# Altium PCB FMC_DIO_32ch_lvds_a.PcbDoc (part 6 of 6)
Units mm, origin at the board's own origin, x right, y up, seen from the top; angles counter-clockwise.
Board outline 69.13 x 77.46 mm, 4 copper layers (Top Layer, G, SUP, Bottom Layer), stack 1.448 mm thick; 558 components, 348 nets, 1996 pads, 784 vias.
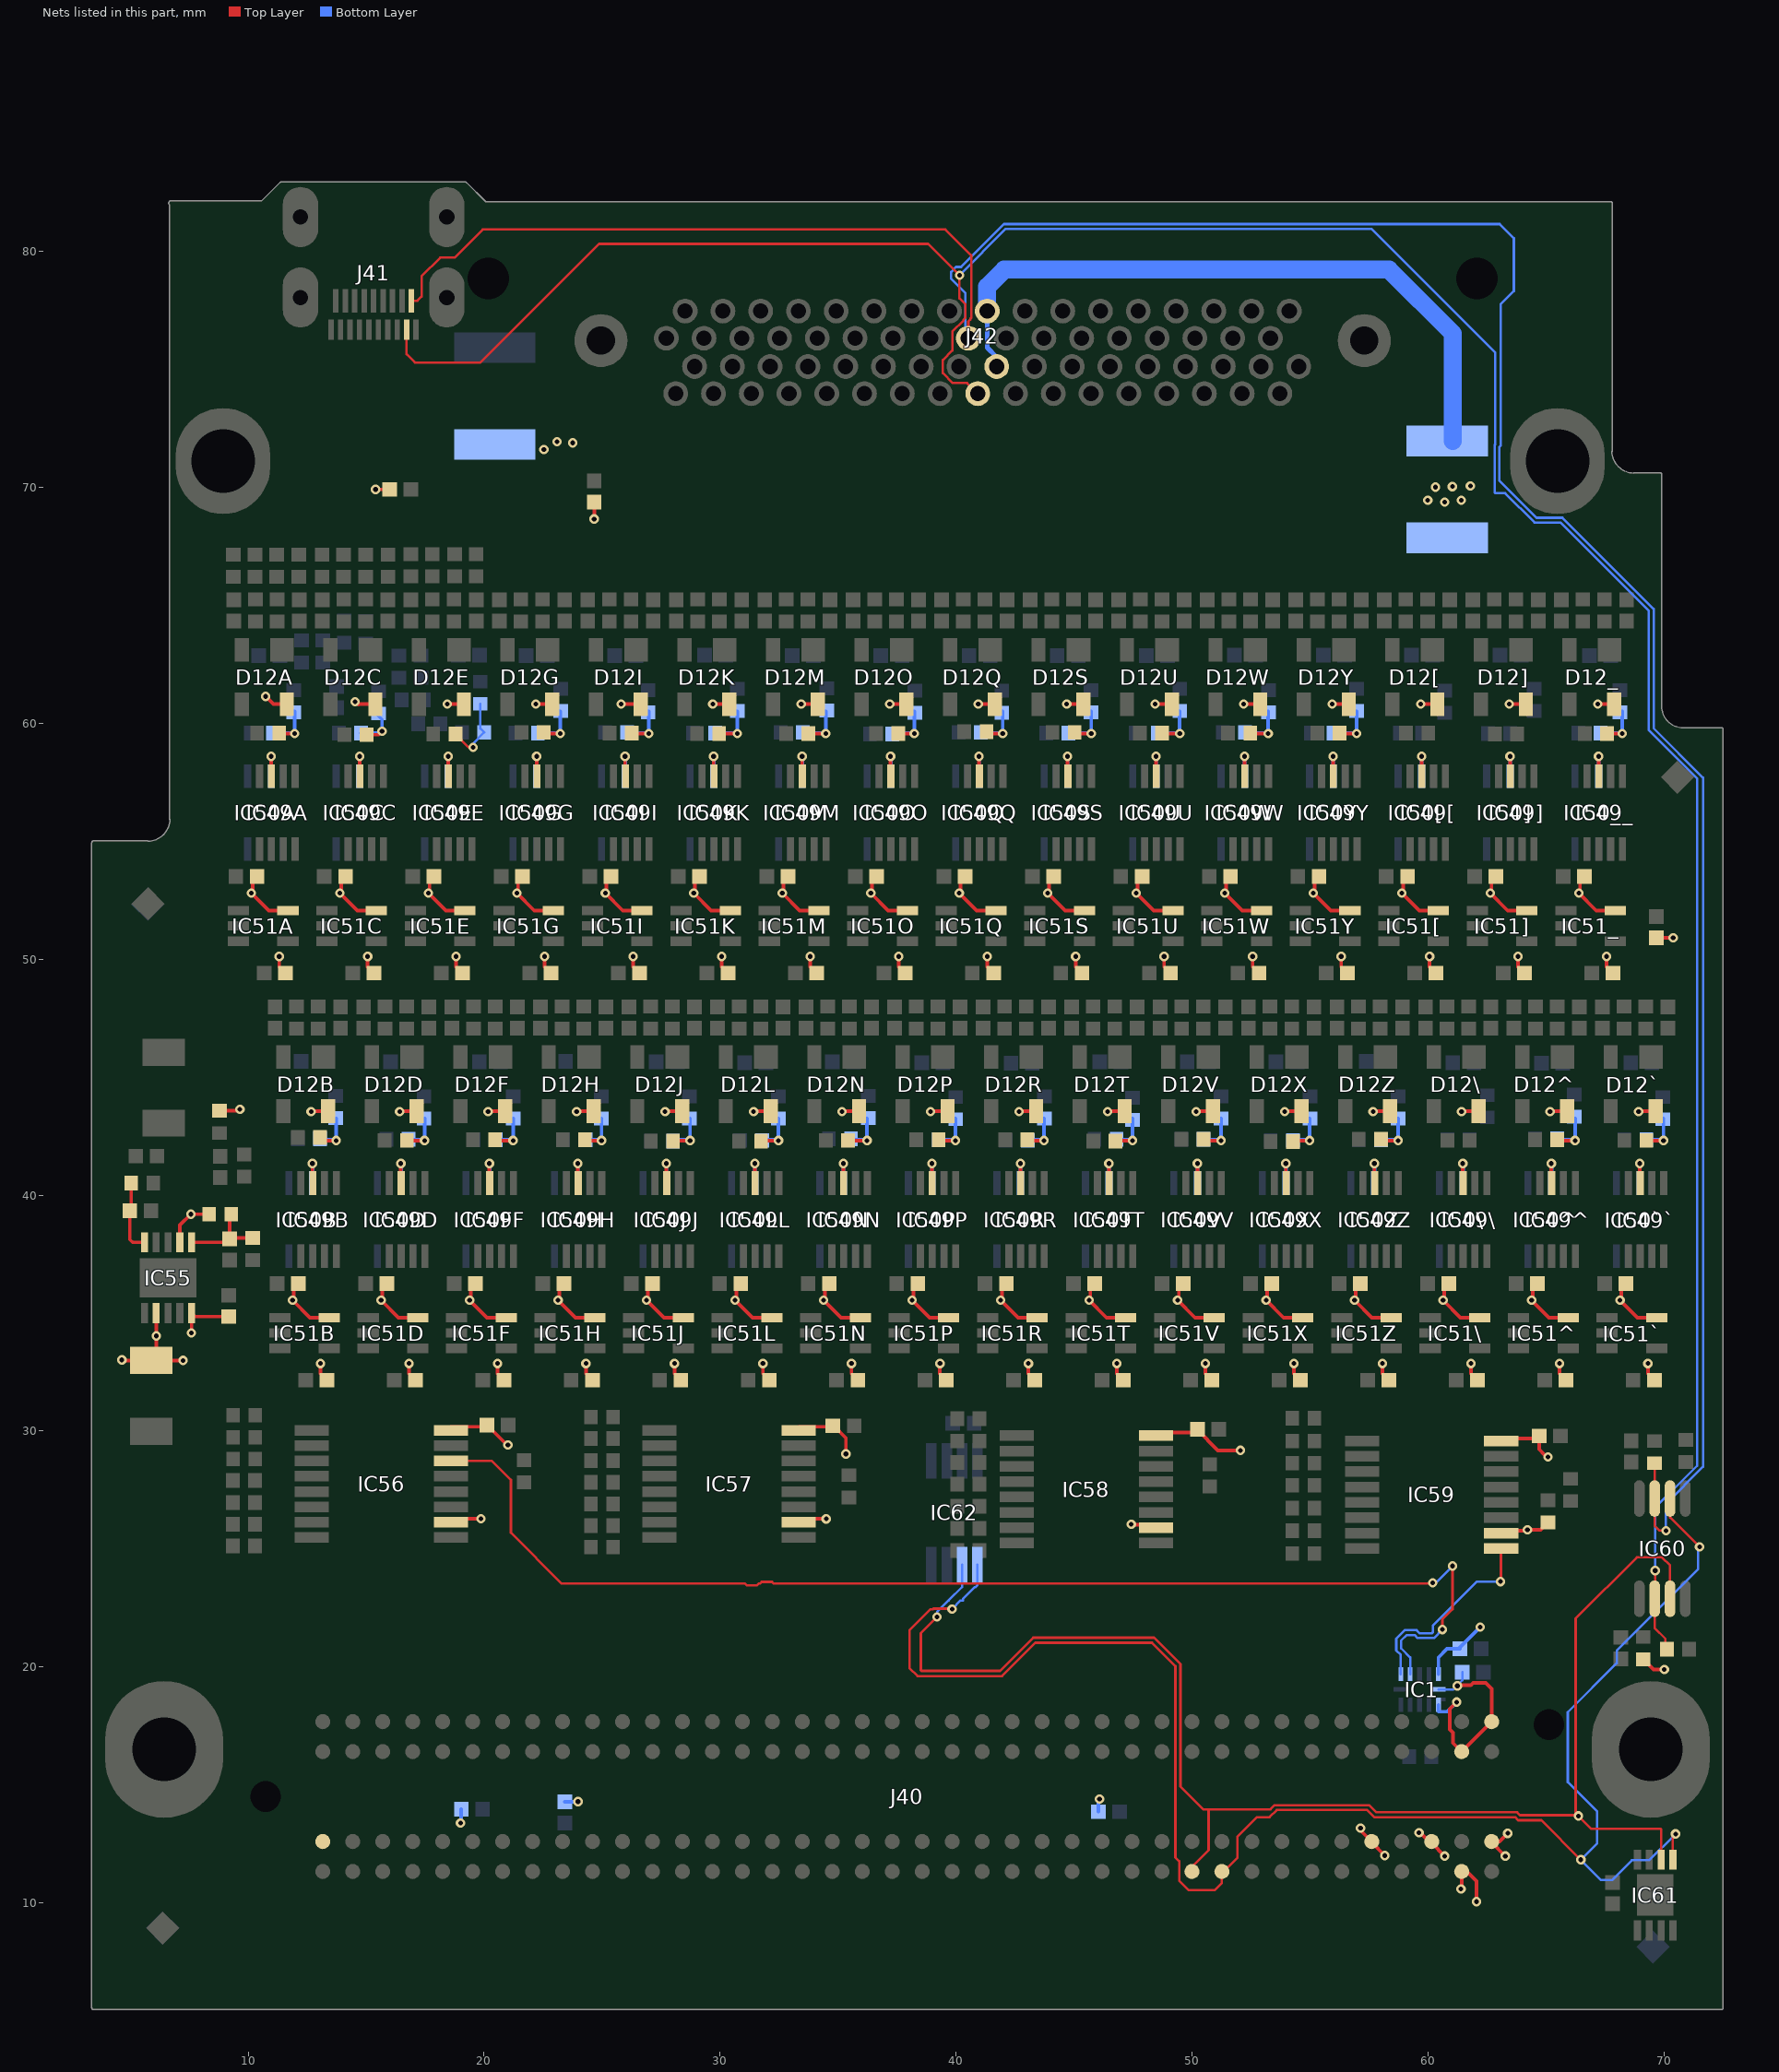
[diagram p8: the nets of this part, all layers, seen from the top]

## Via types
v1: diameter 0.4, hole 0.2, Top Layer to Bottom Layer, tented both sides, 760 vias
v2: diameter 0.4, hole 0.2, Top Layer to Bottom Layer, 24 vias

## Nets (pads, with @x,y where several pads share a name; then routed paths per layer and width w, separated by ;. In a path a pad name is that pad's centre, name@x,y a point inside that pad or via, vN(x,y) a via of type N, cw(c..) or ccw(c..) an arc to the next point about the centre after c; other vN are vias at no path point) (continued)
NetR1^_1: R1^.1 R244^.1 R245^.1 | length 2.3
  Top Layer w0.152: R245^.1@65.552,42.316 v1(66.225,42.316)
  Bottom Layer w0.152: R244^.1@65.501,42.342 v1@66.199,42.342 ; v1(66.225,42.316) R1^.1@66.225,43.243
NetR1__1: R1_.1 R244_.1 R245_.1 | length 2.3
  Top Layer w0.152: R245_.1@67.552,59.566 v1(68.225,59.566)
  Bottom Layer w0.152: R244_.1@67.501,59.592 v1@68.199,59.592 ; v1(68.225,59.566) R1_.1@68.225,60.493
NetR1`_1: R1`.1 R244`.1 R245`.1 | length 2.3
  Top Layer w0.152: R245`.1@69.302,42.316 v1(69.975,42.316)
  Bottom Layer w0.152: R244`.1@69.251,42.342 v1@69.949,42.342 ; v1(69.975,42.316) R1`.1@69.975,43.243
NetR1A_1: R1A.1 R244A.1 R245A.1 | length 2.3
  Top Layer w0.152: R245A.1@11.302,59.566 v1(11.975,59.566)
  Bottom Layer w0.152: R244A.1@11.251,59.592 v1@11.949,59.592 ; v1(11.975,59.566) R1A.1@11.975,60.493
NetR1B_1: R1B.1 R244B.1 R245B.1 | length 2.3
  Top Layer w0.152: R245B.1@13.052,42.316 v1(13.725,42.316)
  Bottom Layer w0.152: R244B.1@13.001,42.342 v1@13.699,42.342 ; v1(13.725,42.316) R1B.1@13.725,43.243
NetR1C_1: R1C.1 R244C.1 R245C.1 | length 2.5
  Top Layer w0.152: R245C.1@15.024,59.512 15.519,59.512 v1(15.672,59.665)
  Bottom Layer w0.152: R244C.1@14.783,59.588 15.596,59.588 v1(15.672,59.665) 15.672,60.16 R1C.1@15.418,60.414
NetR1D_1: R1D.1 R244D.1 R245D.1 | length 2.3
  Top Layer w0.152: R245D.1@16.802,42.316 v1(17.475,42.316)
  Bottom Layer w0.152: R244D.1@16.751,42.342 v1@17.449,42.342 ; v1(17.475,42.316) R1D.1@17.475,43.243
NetR1E_1: R1E.1 R244E.1 R245E.1 | length 3.1
  Top Layer w0.102: R245E.1@18.783,59.538 19.342,58.979 v1(19.533,58.979)
  Bottom Layer w0.102: v1(19.533,58.979) 19.507,59.004 19.507,59.118 R244E.1@20.003,59.614 19.837,59.779 R1E.1@19.837,60.82
NetR1F_1: R1F.1 R244F.1 R245F.1 | length 2.3
  Top Layer w0.152: R245F.1@20.552,42.316 v1(21.225,42.316)
  Bottom Layer w0.152: R244F.1@20.501,42.342 v1@21.199,42.342 ; v1(21.225,42.316) R1F.1@21.225,43.243
NetR1G_1: R1G.1 R244G.1 R245G.1 | length 2.3
  Top Layer w0.152: R245G.1@22.552,59.566 v1(23.225,59.566)
  Bottom Layer w0.152: R244G.1@22.501,59.592 v1@23.199,59.592 ; v1(23.225,59.566) R1G.1@23.225,60.493
NetR1H_1: R1H.1 R244H.1 R245H.1 | length 2.3
  Top Layer w0.152: R245H.1@24.302,42.316 v1(24.975,42.316)
  Bottom Layer w0.152: R244H.1@24.251,42.342 v1@24.949,42.342 ; v1(24.975,42.316) R1H.1@24.975,43.243
NetR1I_1: R1I.1 R244I.1 R245I.1 | length 2.3
  Top Layer w0.152: R245I.1@26.302,59.566 v1(26.975,59.566)
  Bottom Layer w0.152: R244I.1@26.06,59.563 R244I.1@26.06,59.614 ; R244I.1@26.251,59.592 v1@26.949,59.592 ; v1(26.975,59.566) R1I.1@26.975,60.493
NetR1J_1: R1J.1 R244J.1 R245J.1 | length 2.3
  Top Layer w0.152: R245J.1@28.052,42.316 v1(28.725,42.316)
  Bottom Layer w0.152: R244J.1@28.001,42.342 v1@28.699,42.342 ; v1(28.725,42.316) R1J.1@28.725,43.243
NetR1K_1: R1K.1 R244K.1 R245K.1 | length 2.3
  Top Layer w0.152: R245K.1@30.052,59.566 v1(30.725,59.566)
  Bottom Layer w0.152: R244K.1@30.001,59.592 v1@30.699,59.592 ; v1(30.725,59.566) R1K.1@30.725,60.493
NetR1L_1: R1L.1 R244L.1 R245L.1 | length 2.3
  Top Layer w0.152: R245L.1@31.802,42.316 v1(32.475,42.316)
  Bottom Layer w0.152: R244L.1@31.751,42.342 v1@32.449,42.342 ; v1(32.475,42.316) R1L.1@32.475,43.243
NetR1M_1: R1M.1 R244M.1 R245M.1 | length 2.3
  Top Layer w0.152: R245M.1@33.802,59.566 v1(34.475,59.566)
  Bottom Layer w0.152: R244M.1@33.751,59.592 v1@34.449,59.592 ; v1(34.475,59.566) R1M.1@34.475,60.493
NetR1N_1: R1N.1 R244N.1 R245N.1 | length 2.3
  Top Layer w0.152: R245N.1@35.552,42.316 v1(36.225,42.316)
  Bottom Layer w0.152: R244N.1@35.501,42.342 v1@36.199,42.342 ; v1(36.225,42.316) R1N.1@36.225,43.243
NetR1O_1: R1O.1 R244O.1 R245O.1 | length 2.3
  Top Layer w0.152: R245O.1@37.552,59.566 v1(38.225,59.566)
  Bottom Layer w0.152: R244O.1@37.501,59.592 v1@38.199,59.592 ; v1(38.225,59.566) R1O.1@38.225,60.493
NetR1P_1: R1P.1 R244P.1 R245P.1 | length 2.3
  Top Layer w0.152: R245P.1@39.302,42.316 v1(39.975,42.316)
  Bottom Layer w0.152: R244P.1@39.251,42.342 v1@39.949,42.342 ; v1(39.975,42.316) R1P.1@39.975,43.243
NetR1Q_1: R1Q.1 R244Q.1 R245Q.1 | length 2.3
  Top Layer w0.152: R245Q.1@41.302,59.566 v1(41.975,59.566)
  Bottom Layer w0.152: R244Q.1@41.251,59.592 v1@41.949,59.592 ; v1(41.975,59.566) R1Q.1@41.975,60.493
NetR1R_1: R1R.1 R244R.1 R245R.1 | length 2.3
  Top Layer w0.152: R245R.1@43.052,42.316 v1(43.725,42.316)
  Bottom Layer w0.152: R244R.1@43.001,42.342 v1@43.699,42.342 ; v1(43.725,42.316) R1R.1@43.725,43.243
NetR1S_1: R1S.1 R244S.1 R245S.1 | length 2.3
  Top Layer w0.152: R245S.1@45.052,59.566 v1(45.725,59.566)
  Bottom Layer w0.152: R244S.1@45.001,59.592 v1@45.699,59.592 ; v1(45.725,59.566) R1S.1@45.725,60.493
NetR1T_1: R1T.1 R244T.1 R245T.1 | length 2.3
  Top Layer w0.152: R245T.1@46.802,42.316 v1(47.475,42.316)
  Bottom Layer w0.152: R244T.1@46.751,42.342 v1@47.449,42.342 ; v1(47.475,42.316) R1T.1@47.475,43.243
NetR1U_1: R1U.1 R244U.1 R245U.1 | length 2.3
  Top Layer w0.152: R245U.1@48.802,59.566 v1(49.475,59.566)
  Bottom Layer w0.152: R244U.1@48.751,59.592 v1@49.449,59.592 ; v1(49.475,59.566) R1U.1@49.475,60.493
NetR1V_1: R1V.1 R244V.1 R245V.1 | length 2.3
  Top Layer w0.152: R245V.1@50.552,42.316 v1(51.225,42.316)
  Bottom Layer w0.152: R244V.1@50.501,42.342 v1@51.199,42.342 ; v1(51.225,42.316) R1V.1@51.225,43.243
NetR1W_1: R1W.1 R244W.1 R245W.1 | length 2.3
  Top Layer w0.152: R245W.1@52.552,59.566 v1(53.225,59.566)
  Bottom Layer w0.152: R244W.1@52.501,59.592 v1@53.199,59.592 ; v1(53.225,59.566) R1W.1@53.225,60.493
NetR1X_1: R1X.1 R244X.1 R245X.1 | length 2.3
  Top Layer w0.152: R245X.1@54.302,42.316 v1(54.975,42.316)
  Bottom Layer w0.152: R244X.1@54.251,42.342 v1@54.949,42.342 ; v1(54.975,42.316) R1X.1@54.975,43.243
NetR1Y_1: R1Y.1 R244Y.1 R245Y.1 | length 2.3
  Top Layer w0.152: R245Y.1@56.302,59.566 v1(56.975,59.566)
  Bottom Layer w0.152: R244Y.1@56.251,59.592 v1@56.949,59.592 ; v1(56.975,59.566) R1Y.1@56.975,60.493
NetR1Z_1: R1Z.1 R244Z.1 R245Z.1 | length 2.4
  Top Layer w0.152: R245Z.1@58.001,42.367 58.052,42.316 v1(58.725,42.316)
  Bottom Layer w0.152: R244Z.1@58.001,42.342 58.699,42.342 v1(58.725,42.316) R1Z.1@58.725,43.243
P3V3: C1.1 C127[.2 C127\.2 C127].2 C127^.2 C127_.2 C127`.2 C127A.2 C127B.2 C127C.2 C127D.2 C127E.2 C127F.2 C127G.2 C127H.2 C127I.2 C127J.2 C127K.2 C127L.2 C127M.2 C127N.2 C127O.2 C127P.2 C127Q.2 C127R.2 C127S.2 C127T.2 C127U.2 C127V.2 C127W.2 C127X.2 C127Y.2 C127Z.2 C128[.2 C128\.2 C128].2 C128^.2 C128_.2 C128`.2 C128A.2 C128B.2 C128C.2 C128D.2 C128E.2 C128F.2 C128G.2 C128H.2 C128I.2 C128J.2 C128K.2 C128L.2 C128M.2 C128N.2 C128O.2 C128P.2 C128Q.2 C128R.2 C128S.2 C128T.2 C128U.2 C128V.2 C128W.2 C128X.2 C128Y.2 C128Z.2 C146.2 C148.2 C153.2 C154.2 C155.2 C156.2 C157.1 C158.1 C159.1 C160.1 C161.1 C162.1 D12[.4 D12\.4 D12].4 D12^.4 D12_.4 D12`.4 D12A.4 D12B.4 D12C.4 D12D.4 D12E.4 D12F.4 D12G.4 D12H.4 D12I.4 D12J.4 D12K.4 D12L.4 D12M.4 D12N.4 D12O.4 D12P.4 D12Q.4 D12R.4 D12S.4 D12T.4 D12U.4 D12V.4 D12W.4 D12X.4 D12Y.4 D12Z.4 F6.1 F7.2 IC1.11 IC49[.7 IC49\.7 IC49].7 IC49^.7 IC49_.7 IC49`.7 IC49A.7 IC49B.7 IC49C.7 IC49D.7 IC49E.7 IC49F.7 IC49G.7 IC49H.7 IC49I.7 IC49J.7 IC49K.7 IC49L.7 IC49M.7 IC49N.7 IC49O.7 IC49P.7 IC49Q.7 IC49R.7 IC49S.7 IC49T.7 IC49U.7 IC49V.7 IC49W.7 IC49X.7 IC49Y.7 IC49Z.7 IC50[.7 IC50\.7 IC50].7 IC50^.7 IC50_.7 IC50`.7 IC50A.7 IC50B.7 IC50C.7 IC50D.7 IC50E.7 IC50F.7 IC50G.7 IC50H.7 IC50I.7 IC50J.7 IC50K.7 IC50L.7 IC50M.7 IC50N.7 IC50O.7 IC50P.7 IC50Q.7 IC50R.7 IC50S.7 IC50T.7 IC50U.7 IC50V.7 IC50W.7 IC50X.7 IC50Y.7 IC50Z.7 IC51[.5 IC51\.5 IC51].5 IC51^.5 IC51_.5 IC51`.5 IC51A.5 IC51B.5 IC51C.5 IC51D.5 IC51E.5 IC51F.5 IC51G.5 IC51H.5 IC51I.5 IC51J.5 IC51K.5 IC51L.5 IC51M.5 IC51N.5 IC51O.5 IC51P.5 IC51Q.5 IC51R.5 IC51S.5 IC51T.5 IC51U.5 IC51V.5 IC51W.5 IC51X.5 IC51Y.5 IC51Z.5 IC55.2 IC55.7 IC55.10 IC56.10 IC56.16 IC57.10 IC57.16 IC58.10 IC58.16 IC59.10 IC59.16 J40.c39 J40.d36 J40.d38 J40.d40 R251.1 R254.2 R308.1 R309.1 | length 225.9
  Top Layer w0.102: IC49A.7@10.972,57.775 IC49A.7@10.986,57.761 ; IC49B.7@12.722,40.525 IC49B.7@12.736,40.511 ; IC49C.7@14.722,57.775 IC49C.7@14.736,57.761 ; IC49D.7@16.472,40.525 IC49D.7@16.486,40.511 ; IC49E.7@18.472,57.775 IC49E.7@18.486,57.761 ; IC49F.7@20.222,40.525 IC49F.7@20.236,40.511 ; IC49G.7@22.222,57.775 IC49G.7@22.236,57.761 ; IC49H.7@23.972,40.525 IC49H.7@23.986,40.511 ; IC49I.7@25.972,57.775 IC49I.7@25.986,57.761 ; IC49J.7@27.722,40.525 IC49J.7@27.736,40.511 ; IC49K.7@29.722,57.775 IC49K.7@29.736,57.761 ; IC49L.7@31.472,40.525 IC49L.7@31.486,40.511 ; IC49M.7@33.472,57.775 IC49M.7@33.486,57.761 ; IC49N.7@35.222,40.525 IC49N.7@35.236,40.511 ; IC49O.7@37.222,57.775 IC49O.7@37.236,57.761 ; IC49P.7@38.972,40.525 IC49P.7@38.986,40.511 ; IC49Q.7@40.972,57.775 IC49Q.7@40.986,57.761 ; IC49R.7@42.722,40.525 IC49R.7@42.736,40.511 ; IC49S.7@44.722,57.775 IC49S.7@44.736,57.761 ; IC49T.7@46.472,40.525 IC49T.7@46.486,40.511 ; IC49U.7@48.472,57.775 IC49U.7@48.486,57.761 ; IC49V.7@50.222,40.525 IC49V.7@50.236,40.511 ; IC49W.7@52.222,57.775 IC49W.7@52.236,57.761 ; IC49X.7@53.972,40.525 IC49X.7@53.986,40.511 ; IC49Y.7@55.972,57.775 IC49Y.7@55.986,57.761 ; IC49Z.7@57.722,40.525 IC49Z.7@57.736,40.511 ; IC49[.7@59.722,57.775 IC49[.7@59.736,57.761 ; IC49\.7@61.472,40.525 IC49\.7@61.486,40.511 ; IC49].7@63.472,57.775 IC49].7@63.486,57.761 ; IC49^.7@65.222,40.525 IC49^.7@65.236,40.511 ; IC49_.7@67.222,57.775 IC49_.7@67.236,57.761 ; IC49`.7@68.972,40.525 IC49`.7@68.986,40.511
  Top Layer w0.152: v1(4.648,33.02) 4.672,32.996 C148.2@5.893,32.996 ; IC55.7@6.104,35 v1(6.104,34.036) 6.104,33.207 C148.2@5.893,32.996 ; IC55.2@7.104,38 7.104,38.727 v1(7.569,39.192) R251.1@8.344,39.192 ; v1(7.238,32.996) C148.2@5.893,32.996 ; v1(7.595,34.163) 7.604,34.172 IC55.10@7.604,35 7.748,34.856 C146.2@9.169,34.856 ; R254.2@8.788,43.574 9.589,43.574 v1(9.652,43.637) ; C128A.2@10.186,53.411 10.186,52.851 v1(10.134,52.799) 10.871,52.061 IC51A.5@11.686,52.061 ; v1(10.744,61.138) 11.072,60.81 D12A.4@11.639,60.81 ; IC49A.7@10.972,57.775 v1(10.972,58.594) ; v1(11.314,50.114) 11.314,49.683 C127A.2@11.586,49.411 ; C128B.2@11.936,36.161 11.936,35.601 v1(11.884,35.549) 12.621,34.811 IC51B.5@13.436,34.811 ; v1(12.668,43.542) 12.686,43.56 D12B.4@13.389,43.56 ; IC49B.7@12.722,40.525 v1(12.722,41.344) ; v1(13.064,32.864) 13.064,32.433 C127B.2@13.336,32.161 ; C128C.2@13.936,53.411 13.936,52.851 v1(13.884,52.799) 14.621,52.061 IC51C.5@15.436,52.061 ; v1@14.668,60.792 14.686,60.81 D12C.4@15.389,60.81 ; IC49C.7@14.722,57.775 v1(14.722,58.594) ; v1(15.064,50.114) 15.064,49.683 C127C.2@15.336,49.411 ; v1(15.4,69.91) C158.1@15.991,69.91 ; C128D.2@15.686,36.161 15.686,35.601 v1(15.634,35.549) 16.371,34.811 IC51D.5@17.186,34.811 ; v1(16.418,43.542) 16.436,43.56 D12D.4@17.139,43.56 ; IC49D.7@16.472,40.525 v1(16.472,41.344) ; v1(16.814,32.864) 16.814,32.433 C127D.2@17.086,32.161 ; C128E.2@17.686,53.411 17.686,52.851 v1(17.634,52.799) 18.371,52.061 IC51E.5@19.186,52.061 ; v1@18.418,60.792 v1(18.436,60.81) D12E.4@19.139,60.81 ; IC49E.7@18.472,57.775 v1(18.472,58.594) ; IC56.10@18.586,26.286 v1(19.869,26.286) ; IC56.16@18.586,30.186 19.921,30.186 C156.2@20.055,30.32 ; v1(18.814,50.114) 18.814,49.683 C127E.2@19.086,49.411 ; C128F.2@19.436,36.161 19.436,35.601 v1(19.384,35.549) 20.121,34.811 IC51F.5@20.936,34.811 ; C156.2@20.124,30.251 20.13,30.251 v1@20.987,29.394 ; v1(20.168,43.542) 20.186,43.56 D12F.4@20.889,43.56 ; IC49F.7@20.222,40.525 v1(20.222,41.344) ; v1(20.564,32.864) 20.564,32.433 C127F.2@20.836,32.161 ; C128G.2@21.436,53.411 21.436,52.851 v1(21.384,52.799) 22.121,52.061 IC51G.5@22.936,52.061 ; v1@22.168,60.792 v1(22.186,60.81) D12G.4@22.889,60.81 ; IC49G.7@22.222,57.775 v1(22.222,58.594) ; v1(22.564,50.114) 22.564,49.683 C127G.2@22.836,49.411 ; C128H.2@23.186,36.161 23.186,35.601 v1(23.134,35.549) 23.871,34.811 IC51H.5@24.686,34.811 ; v1(23.918,43.542) 23.936,43.56 D12H.4@24.639,43.56 ; IC49H.7@23.972,40.525 v1(23.972,41.344) ; v1(24.314,32.864) 24.314,32.433 C127H.2@24.586,32.161 ; v1(24.663,68.656) C157.1@24.663,69.375 ; C128I.2@25.186,53.411 25.186,52.851 v1(25.134,52.799) 25.871,52.061 IC51I.5@26.686,52.061 ; v1(25.804,60.81) D12I.4@26.639,60.81 ; IC49I.7@25.972,57.775 v1(25.972,58.594) ; v1(26.314,50.114) 26.314,49.683 C127I.2@26.586,49.411 ; C128J.2@26.936,36.161 26.936,35.601 v1(26.884,35.549) 27.621,34.811 IC51J.5@28.436,34.811 ; v1(27.668,43.542) 27.686,43.56 D12J.4@28.389,43.56 ; IC49J.7@27.722,40.525 v1(27.722,41.344) ; v1(28.064,32.864) 28.064,32.433 C127J.2@28.336,32.161 ; C128K.2@28.936,53.411 28.936,52.851 v1(28.884,52.799) 29.621,52.061 IC51K.5@30.436,52.061 ; v1(29.686,60.81) D12K.4@30.389,60.81 ; IC49K.7@29.722,57.775 v1(29.722,58.594) ; v1(30.064,50.114) 30.064,49.683 C127K.2@30.336,49.411 ; C128L.2@30.686,36.161 30.686,35.601 v1(30.634,35.549) 31.371,34.811 IC51L.5@32.186,34.811 ; v1(31.418,43.542) 31.436,43.56 D12L.4@32.139,43.56 ; IC49L.7@31.472,40.525 v1(31.472,41.344) ; v1(31.814,32.864) 31.814,32.433 C127L.2@32.086,32.161 ; C128M.2@32.686,53.411 32.686,52.851 v1(32.634,52.799) 33.371,52.061 IC51M.5@34.186,52.061 ; IC57.10@33.336,26.286 34.487,26.286 v1(34.493,26.28) ; IC57.16@33.336,30.186 34.627,30.186 C155.2@34.724,30.282 ; v1@33.418,60.792 v1(33.436,60.81) D12M.4@34.139,60.81 ; IC49M.7@33.472,57.775 v1(33.472,58.594) ; v1(33.814,50.114) 33.814,49.683 C127M.2@34.086,49.411 ; C128N.2@34.436,36.161 34.436,35.601 v1(34.384,35.549) 35.121,34.811 IC51N.5@35.936,34.811 ; C155.2@34.78,30.226 34.808,30.226 35.331,29.703 v1(35.331,29.032) ; v1(35.168,43.542) 35.186,43.56 D12N.4@35.889,43.56 ; IC49N.7@35.222,40.525 v1(35.222,41.344) ; v1(35.564,32.864) 35.564,32.433 C127N.2@35.836,32.161 ; C128O.2@36.436,53.411 36.436,52.851 v1(36.384,52.799) 37.121,52.061 IC51O.5@37.936,52.061 ; v1@37.168,60.792 v1(37.186,60.81) D12O.4@37.889,60.81 ; IC49O.7@37.222,57.775 v1(37.222,58.594) ; v1(37.564,50.114) 37.564,49.683 C127O.2@37.836,49.411 ; C128P.2@38.186,36.161 38.186,35.601 v1(38.134,35.549) 38.871,34.811 IC51P.5@39.686,34.811 ; v1(38.918,43.542) 38.936,43.56 D12P.4@39.639,43.56 ; IC49P.7@38.972,40.525 v1(38.972,41.344) ; v1(39.314,32.864) 39.314,32.433 C127P.2@39.586,32.161 ; C128Q.2@40.186,53.411 40.186,52.851 v1(40.134,52.799) 40.871,52.061 IC51Q.5@41.686,52.061 ; v1@40.918,60.792 v1(40.936,60.81) D12Q.4@41.639,60.81 ; IC49Q.7@40.972,57.775 v1(40.972,58.594) ; v1(41.314,50.114) 41.314,49.683 C127Q.2@41.586,49.411 ; C128R.2@41.936,36.161 41.936,35.601 v1(41.884,35.549) 42.621,34.811 IC51R.5@43.436,34.811 ; v1(42.668,43.542) 42.686,43.56 D12R.4@43.389,43.56 ; IC49R.7@42.722,40.525 v1(42.722,41.344) ; v1(43.064,32.864) 43.064,32.433 C127R.2@43.336,32.161 ; C128S.2@43.936,53.411 43.936,52.851 v1(43.884,52.799) 44.621,52.061 IC51S.5@45.436,52.061 ; v1@44.668,60.792 v1(44.686,60.81) D12S.4@45.389,60.81 ; IC49S.7@44.722,57.775 v1(44.722,58.594) ; v1(45.064,50.114) 45.064,49.683 C127S.2@45.336,49.411 ; C128T.2@45.686,36.161 45.686,35.601 v1(45.634,35.549) 46.371,34.811 IC51T.5@47.186,34.811 ; v1(46.418,43.542) 46.436,43.56 D12T.4@47.139,43.56 ; IC49T.7@46.472,40.525 v1(46.472,41.344) ; v1(46.814,32.864) 46.814,32.433 C127T.2@47.086,32.161 ; v1(47.422,26.051) 47.437,26.036 IC58.10@48.586,26.036 ; C128U.2@47.686,53.411 47.686,52.851 v1(47.634,52.799) 48.371,52.061 IC51U.5@49.186,52.061 ; v1@48.418,60.792 v1(48.436,60.81) D12U.4@49.139,60.81 ; IC49U.7@48.472,57.775 v1(48.472,58.594) ; IC58.16@48.586,29.936 C154.2@49.998,29.936 ; v1(48.814,50.114) 48.814,49.683 C127U.2@49.086,49.411 ; C128V.2@49.436,36.161 49.436,35.601 v1(49.384,35.549) 50.121,34.811 IC51V.5@50.936,34.811 ; v1(50.168,43.542) 50.186,43.56 D12V.4@50.889,43.56 ; IC49V.7@50.222,40.525 v1(50.222,41.344) ; C154.2@50.223,30.074 50.223,30.054 51.092,29.185 v1(52.045,29.185) ; v1(50.564,32.864) 50.564,32.433 C127V.2@50.836,32.161 ; C128W.2@51.436,53.411 51.436,52.851 v1(51.384,52.799) 52.121,52.061 IC51W.5@52.936,52.061 ; v1@52.168,60.792 v1(52.186,60.81) D12W.4@52.889,60.81 ; IC49W.7@52.222,57.775 v1(52.222,58.594) ; v1(52.564,50.114) 52.564,49.683 C127W.2@52.836,49.411 ; C128X.2@53.186,36.161 53.186,35.601 v1(53.134,35.549) 53.871,34.811 IC51X.5@54.686,34.811 ; v1(53.918,43.542) 53.936,43.56 D12X.4@54.639,43.56 ; IC49X.7@53.972,40.525 v1(53.972,41.344) ; v1(54.314,32.864) 54.314,32.433 C127X.2@54.586,32.161 ; C128Y.2@55.186,53.411 55.186,52.851 v1(55.134,52.799) 55.871,52.061 IC51Y.5@56.686,52.061 ; v1@55.918,60.792 v1(55.936,60.81) D12Y.4@56.639,60.81 ; IC49Y.7@55.972,57.775 v1(55.972,58.594) ; v1(56.314,50.114) 56.314,49.683 C127Y.2@56.586,49.411 ; C128Z.2@56.936,36.161 56.936,35.601 v1(56.884,35.549) 57.621,34.811 IC51Z.5@58.436,34.811 ; v2(57.137,13.17) 57.137,13.081 J40.d36@57.612,12.606 57.612,12.568 v1(58.166,12.014) ; v1(57.668,43.542) 57.686,43.56 D12Z.4@58.389,43.56 ; IC49Z.7@57.722,40.525 v1(57.722,41.344) ; v1(58.064,32.864) 58.064,32.433 C127Z.2@58.336,32.161 ; C128[.2@58.936,53.411 58.936,52.851 v1(58.884,52.799) 59.621,52.061 IC51[.5@60.436,52.061 ; v2(59.614,12.979) 59.665,12.979 60.038,12.606 J40.d38@60.152,12.606 60.152,12.543 v1(60.706,11.989) ; v1@59.668,60.792 v1(59.686,60.81) D12[.4@60.389,60.81 ; IC49[.7@59.722,57.775 v1(59.722,58.594) ; v1(60.064,50.114) 60.064,49.683 C127[.2@60.336,49.411 ; C128\.2@60.686,36.161 60.686,35.601 v1(60.634,35.549) 61.371,34.811 IC51\.5@62.186,34.811 ; v1(61.392,10.592) 61.422,10.622 J40.c39@61.422,11.336 61.638,11.336 62.052,10.922 v2(62.052,10.058) ; v1(61.418,43.542) 61.436,43.56 D12\.4@62.139,43.56 ; IC49\.7@61.472,40.525 v1(61.472,41.344) ; v1(61.814,32.864) 61.814,32.433 C127\.2@62.086,32.161 ; C128].2@62.686,53.411 62.686,52.851 v1(62.634,52.799) 63.371,52.061 IC51].5@64.186,52.061 ; IC59.10@63.086,25.786 64.175,25.786 v1(64.211,25.822) 64.773,25.822 R308.1@65.075,26.124 ; IC59.16@63.086,29.686 C153.2@64.694,29.686 ; v1(63.271,11.989) 62.692,12.568 J40.d40@62.692,12.606 63.025,12.606 v2(63.373,12.954) ; v1@63.418,60.792 v1(63.436,60.81) D12].4@64.139,60.81 ; IC49].7@63.472,57.775 v1(63.472,58.594) ; v1(63.814,50.114) 63.814,49.683 C127].2@64.086,49.411 ; C128^.2@64.436,36.161 64.436,35.601 v1(64.384,35.549) 65.121,34.811 IC51^.5@65.936,34.811 ; C153.2@64.701,29.794 64.701,29.228 v1@64.948,28.981 ; v1(65.168,43.542) 65.186,43.56 D12^.4@65.889,43.56 ; IC49^.7@65.222,40.525 v1(65.222,41.344) ; v1(65.564,32.864) 65.564,32.433 C127^.2@65.836,32.161 ; C128_.2@66.436,53.411 66.436,52.851 v1(66.384,52.799) 67.121,52.061 IC51_.5@67.936,52.061 ; v1(67.186,60.81) D12_.4@67.889,60.81 ; IC49_.7@67.222,57.775 v1(67.222,58.594) ; v1(67.564,50.114) 67.564,49.683 C127_.2@67.836,49.411 ; C128`.2@68.186,36.161 68.186,35.601 v1(68.134,35.549) 68.871,34.811 IC51`.5@69.686,34.811 ; v1(68.918,43.542) 68.936,43.56 D12`.4@69.639,43.56 ; IC49`.7@68.972,40.525 v1(68.972,41.344) ; R309.1@69.113,20.333 69.548,19.898 v1(70.01,19.898) ; v1(69.314,32.864) 69.314,32.433 C127`.2@69.586,32.161 ; C159.1@69.672,50.909 70.376,50.909 v1(70.383,50.902)
  Bottom Layer w0.152: v1(10.972,58.594) 10.978,58.587 IC50A.7@10.978,57.761 ; v1(12.722,41.344) 12.728,41.337 IC50B.7@12.728,40.511 ; v1(14.722,58.594) 14.728,58.587 IC50C.7@14.728,57.761 ; v1(16.472,41.344) 16.478,41.337 IC50D.7@16.478,40.511 ; v1(18.472,58.594) 18.478,58.587 IC50E.7@18.478,57.761 ; v1(18.999,13.386) 19.032,13.418 C160.1@19.032,13.97 ; v1(20.222,41.344) 20.228,41.337 IC50F.7@20.228,40.511 ; v1(22.222,58.594) 22.228,58.587 IC50G.7@22.228,57.761 ; C161.1@23.419,14.293 23.97,14.293 v1(23.978,14.3) ; v1(23.972,41.344) 23.978,41.337 IC50H.7@23.978,40.511 ; v1(25.972,58.594) 25.978,58.587 IC50I.7@25.978,57.761 ; v1(27.722,41.344) 27.728,41.337 IC50J.7@27.728,40.511 ; v1(29.722,58.594) 29.728,58.587 IC50K.7@29.728,57.761 ; v1(31.472,41.344) 31.478,41.337 IC50L.7@31.478,40.511 ; v1(33.472,58.594) 33.478,58.587 IC50M.7@33.478,57.761 ; v1(35.222,41.344) 35.228,41.337 IC50N.7@35.228,40.511 ; v1(37.222,58.594) 37.228,58.587 IC50O.7@37.228,57.761 ; v1(38.972,41.344) 38.978,41.337 IC50P.7@38.978,40.511 ; v1(40.972,58.594) 40.978,58.587 IC50Q.7@40.978,57.761 ; v1(42.722,41.344) 42.728,41.337 IC50R.7@42.728,40.511 ; v1(44.722,58.594) 44.728,58.587 IC50S.7@44.728,57.761 ; C162.1@46.032,13.868 46.032,14.358 v1(46.076,14.402) ; v1(46.472,41.344) 46.478,41.337 IC50T.7@46.478,40.511 ; v1(48.472,58.594) 48.478,58.587 IC50U.7@48.478,57.761 ; v1(50.222,41.344) 50.228,41.337 IC50V.7@50.228,40.511 ; v1(52.222,58.594) 52.228,58.587 IC50W.7@52.228,57.761 ; v1(53.972,41.344) 53.978,41.337 IC50X.7@53.978,40.511 ; v1(55.972,58.594) 55.978,58.587 IC50Y.7@55.978,57.761 ; v1(57.722,41.344) 57.728,41.337 IC50Z.7@57.728,40.511 ; v1(59.722,58.594) 59.728,58.587 IC50[.7@59.728,57.761 ; IC1.11@60.439,19.7 60.439,20.409 60.808,20.777 C1.1@61.348,20.777 61.348,20.835 v2(62.205,21.692) ; v1(61.472,41.344) 61.478,41.337 IC50\.7@61.478,40.511 ; v1(63.472,58.594) 63.478,58.587 IC50].7@63.478,57.761 ; v1(65.222,41.344) 65.228,41.337 IC50^.7@65.228,40.511 ; v1(67.222,58.594) 67.228,58.587 IC50_.7@67.228,57.761 ; v1(68.972,41.344) 68.978,41.337 IC50`.7@68.978,40.511
  other v1: 65.075,28.905 21.006,29.413 14.529,60.909 60.698,69.37 59.986,69.446 61.409,69.446 60.317,70.005 61.028,70.03 61.79,70.055 22.53,71.603 23.749,71.882 23.089,71.933
PG_C2M: J40.d1
REFIN: C149.2 IC55.1 R251.2 R253.2 | length 3.7
  Top Layer w0.152: IC55.1@7.604,38 9.076,38 C149.2@9.22,38.144 ; R251.2@9.284,39.192 9.22,39.129 C149.2@9.22,38.144 ; R253.2@10.185,38.189 9.266,38.189 C149.2@9.22,38.144
SCL: IC60.3 IC61.6 IC62.2 J40.c30 | length 62.9
  Top Layer w0.102: v1(39.192,22.123) 38.506,21.438 38.506,19.863 38.532,19.837 41.858,19.837 43.268,21.247 48.388,21.247 49.507,20.128 49.507,14.935 50.468,13.974 50.698,13.974 ; J40.c30@49.992,11.336 49.992,11.537 50.698,12.243 50.698,13.974 ; v1(66.37,13.691) 66.919,13.141 69.858,13.141 69.871,13.128 IC61.6@69.871,11.838 ; IC60.3@70.251,22.894 70.251,24.305 69.908,24.648 68.841,24.648 66.251,22.057 66.251,13.81 66.337,13.724 63.889,13.724 63.77,13.843 57.801,13.843 57.497,14.148 53.499,14.148 53.326,13.974 50.698,13.974
  Bottom Layer w0.102: v1(39.192,22.123) 39.192,22.335 39.676,22.819 39.684,22.819 40.254,23.388 IC62.2@40.254,24.343
SCL_OUT: IC60.2 J41.17 J42.17 R311.1 | length 119.8
  Top Layer w0.102: J41.17@16.716,76.68 16.716,75.638 17.069,75.286 19.837,75.286 24.867,80.315 38.811,80.315 v1(40.143,78.983) 40.143,78 40.395,77.748 40.395,77.187 40.314,77.106 40.314,77.072 39.84,76.598 39.84,75.798 39.44,75.398 39.44,74.837 39.855,74.422 40.463,74.422 J42.17@40.918,73.967 ; v1@69.603,24.069 v1(69.621,24.087) 69.621,22.914 IC60.2@69.601,22.894 69.601,21.648 70.053,21.196 R311.1@70.053,20.726
  Bottom Layer w0.102: v1(40.143,78.983) 42.109,80.95 57.599,80.95 62.847,75.702 62.847,71.823 62.822,71.798 62.822,69.776 62.847,69.75 63.266,69.75 64.511,68.505 65.607,68.505 69.354,64.758 69.354,59.704 71.399,57.658 71.399,28.524 69.621,26.746 v1(69.621,24.087)
SDA: IC60.6 IC61.5 IC62.1 J40.c31 | length 73.4
  Top Layer w0.102: v1(39.827,22.454) 39.805,22.476 39.046,22.476 39.024,22.454 38.913,22.454 38.024,21.565 38.024,19.964 38.367,19.621 41.948,19.621 43.358,21.031 48.299,21.031 49.291,20.039 49.291,11.932 49.454,11.77 49.454,10.947 49.86,10.541 50.952,10.541 51.262,10.851 J40.c31@51.262,11.336 51.341,11.336 51.918,11.913 51.918,12.802 52.756,13.64 53.279,13.64 53.584,13.945 57.412,13.945 57.717,13.64 63.686,13.64 63.818,13.508 64.8,13.508 v1(66.472,11.836) ; IC60.6@70.251,27.144 70.251,26.345 v1(71.501,25.095) ; IC61.5@70.371,11.838 70.371,12.929 v1(70.485,12.929)
  Bottom Layer w0.102: v1(39.827,22.454) 40.194,22.82 40.288,22.82 40.288,22.886 40.792,23.39 40.822,23.39 40.904,23.472 IC62.1@40.904,24.343 ; v1(70.485,12.929) 69.367,11.811 68.631,11.811 67.793,10.973 67.335,10.973 v1(66.472,11.836) 67.165,12.53 67.165,13.878 65.92,15.123 65.92,18.09 67.996,20.165 67.996,20.703 71.437,24.144 71.437,25.031 v1(71.501,25.095)
SDA_OUT: IC60.7 J41.18 J42.51 R310.1 | length 120.7
  Top Layer w0.102: J41.18@16.916,77.905 17.173,77.905 17.348,78.08 17.348,78.943 18.136,79.731 18.745,79.731 19.939,80.924 39.548,80.924 40.64,79.832 40.64,77.187 40.598,77.145 40.598,77.103 40.518,77.022 J42.51@40.518,76.317 ; R310.1@69.596,28.638 69.596,25.984 69.799,25.781 v1(70.079,25.781)
  Bottom Layer w0.102: J42.51@40.518,76.317 40.395,76.44 40.395,78.233 39.79,78.837 39.79,79.129 39.997,79.336 40.208,79.336 42.025,81.153 63.034,81.153 63.634,80.553 63.634,78.318 63.084,77.767 63.084,71.773 63.025,71.714 63.025,70.278 64.595,68.708 65.691,68.708 69.557,64.842 69.557,59.788 71.653,57.691 71.653,28.491 70.079,26.916 v1(70.079,25.781)
SER_IN: IC1.8 IC56.14 | length 52.8
  Top Layer w0.102: IC56.14@18.596,28.737 20.326,28.737 21.133,27.931 21.133,25.695 23.292,23.536 31.053,23.536 31.125,23.465 31.563,23.465 31.634,23.536 31.688,23.536 31.76,23.608 32.198,23.608 32.269,23.536 60.163,23.536 v1(60.198,23.571) ; v2(60.604,21.59) 60.604,22.022 61.036,22.454 v2(61.036,24.282)
  Bottom Layer w0.102: IC1.8@59.239,19.7 59.239,20.405 58.856,20.788 58.856,21.122 59.092,21.357 59.425,21.357 59.548,21.234 60.249,21.234 v2(60.604,21.59) ; v1(60.198,23.571) 60.325,23.571 v2(61.036,24.282)
SER_OUT: IC1.7 IC59.9 | length 8.8
  Top Layer w0.102: v2@63.086,23.622 IC59.9@63.086,25.136
  Bottom Layer w0.102: IC1.7@58.839,19.7 58.839,20.518 58.653,20.704 58.653,21.206 59.007,21.561 59.509,21.561 59.632,21.438 60.165,21.438 60.202,21.475 60.202,21.757 62.067,23.622 v2(63.068,23.622)
SUP: F7.1 J42.18 J42.52 | length 29.3
  Bottom Layer w0.2: J42.52@41.318,77.467 41.318,75.921 41.718,75.521 J42.18@41.718,75.117
  Bottom Layer w0.762: J42.52@41.318,77.467 41.318,78.503 42.037,79.223 58.344,79.223 61.044,76.523 F7.1@61.044,71.96
VADJ: C2.1 IC1.1@60.439,18.4 IC1.12 J40.g39 J40.h40 | length 9.7
  Top Layer w0.152: v2(61.214,18.517) 60.924,18.227 60.924,17.354 61.058,17.221 61.058,16.78 J40.g39@61.422,16.416 J40.h40@62.692,17.686 62.692,19.07 62.438,19.325 61.905,19.325 61.808,19.228 61.265,19.228 v2(61.239,19.202)
  Bottom Layer w0.102: IC1.12@60.439,19.05 61.062,19.05 ; v2@61.227,19.215 61.45,19.438 C2.1@61.45,19.787
  Bottom Layer w0.152: IC1.1@60.439,18.4 60.439,18.11 60.808,18.11 v2(61.214,18.517)
VOSNS: C150.1 IC55.5 R252.2 | length 3.1
  Top Layer w0.152: R252.2@5.042,40.513 5.042,39.401 C150.1@4.986,39.345 4.986,38.118 5.104,38 IC55.5@5.604,38
pads on no net: FTG7.1 FTG8.1 FTG9.1 FTG10.1 FTG11.1 FTG12.1 IC1.1@60.639,18.625 IC51[.1 IC51\.1 IC51].1 IC51^.1 IC51_.1 IC51`.1 IC51A.1 IC51B.1 IC51C.1 IC51D.1 IC51E.1 IC51F.1 IC51G.1 IC51H.1 IC51I.1 IC51J.1 IC51K.1 IC51L.1 IC51M.1 IC51N.1 IC51O.1 IC51P.1 IC51Q.1 IC51R.1 IC51S.1 IC51T.1 IC51U.1 IC51V.1 IC51W.1 IC51X.1 IC51Y.1 IC51Z.1 IC55.9 IC62.3 J40.1 J40.2 J40.c35 J40.c37 J40.d29 J40.d33 J40.d34 J40.h1 J41.15 J42.71 J42.72
copper on no net: | length 0.5
  Bottom Layer w0.152: 60.639,18.625 61.106,18.625

## Polygon pours and split planes (outlines as drawn)
GND on Top Layer "Bottom Layer-No Net 1" (solid, remove dead copper, pour order 24): 6.459,83.257 72.651,83.257 72.829,83.174 73.286,82.96 73.286,57.182 73.286,7.085 72.651,6.789 72.474,6.706 22.156,6.706 2.217,6.706 1.938,6.836 4.427,7.999 4.427,83.423
GND on Top Layer "Bottom Layer-No Net" (solid, pour order 15): 11.201,81.712 11.201,71.171 7.01,71.171 7.01,81.712
GND on Bottom Layer "Bottom Layer-No Net 1" (solid, remove dead copper, pour order 22): 6.736,82.233 71.784,82.233 71.813,82.246 72.651,81.855 72.651,55.278 72.651,6.287 72.55,6.24 72.296,6.121 11.006,6.121 1.658,6.121 -1.872,7.77 -1.872,27.195 -1.872,79.566 3.995,82.306 4.205,82.208 6.688,82.208
no net on G (split plane): 68.798,70.097 68.736,70.091 68.798,70.097 68.807,70.1
P3V3 on G (split plane): 62.155,79.227 62.228,79.206 62.295,79.17 62.353,79.122 62.401,79.063 62.437,78.997 62.459,78.924 62.466,78.849 62.459,78.774 62.437,78.701 62.401,78.635 62.353,78.576 62.295,78.528 62.228,78.492 62.155,78.47 62.08,78.463 62.005,78.47 61.933,78.492 61.866,78.528 61.807,78.576 61.759,78.635 61.724,78.701 61.702,78.774 61.694,78.849 61.702,78.924 61.724,78.997 61.759,79.063 61.807,79.122 61.866,79.17 61.933,79.206 62.005,79.227 62.08,79.235
no net on G (split plane): 70.898,59.297 70.836,59.291 70.898,59.297 70.907,59.3
GND on G (split plane): 65.138,17.579 65.142,17.569 65.138,17.559 65.128,17.555 65.118,17.559 65.114,17.569 65.118,17.579 65.128,17.583
LVDS_REF on G (split plane): 363 vertices, not listed, extent 7.571,41.581 69.025,45.642
LVDS_REF on G (split plane): 353 vertices, not listed, extent 8.383,58.294 67.275,63.981
P3V3 on G (split plane): 19.656,81.79 19.645,81.78 19.664,81.734 19.688,81.758 19.69,81.756 19.695,81.75 19.772,81.686 19.861,81.639 19.956,81.61 20.056,81.6 67.29,81.6 67.29,71.636 67.253,71.547 67.281,71.547 67.277,71.509 67.281,71.472 67.286,71.383 67.313,71.222 67.358,71.065 67.421,70.913 67.5,70.77 67.595,70.637 67.704,70.515 67.826,70.405 67.96,70.311 68.103,70.232 68.254,70.169 68.412,70.124 68.573,70.096 68.662,70.091 68.698,70.088 68.736,70.091 68.736,70.063 68.825,70.1 69.39,70.1 69.39,60.836 69.353,60.747 69.381,60.747 69.377,60.709 69.381,60.672 69.386,60.583 69.413,60.422 69.458,60.265 69.521,60.113 69.6,59.97 69.695,59.837 69.804,59.715 69.926,59.605 70.06,59.511 70.203,59.432 70.354,59.369 70.512,59.324 70.673,59.296 70.762,59.291 70.798,59.288 70.836,59.291 70.836,59.263 70.925,59.3 71.99,59.3 71.99,5.993 3.883,5.993 3.883,54.5 5.647,54.5 5.736,54.463 5.736,54.491 5.675,54.497 5.736,54.491 5.775,54.488 5.811,54.491 5.9,54.496 6.061,54.524 6.219,54.569 6.37,54.632 6.513,54.711 6.647,54.805 6.769,54.915 6.878,55.037 6.973,55.17 7.052,55.313 7.114,55.465 7.16,55.622 7.187,55.783 7.192,55.872 7.196,55.909 7.192,55.947 7.22,55.947 7.183,56.036 7.183,81.638 10.578,81.638 10.677,81.648 10.773,81.677 10.861,81.724 10.939,81.788 11.581,82.431 19.015,82.431
GND on G (split plane): 10.757,14.531 10.761,14.521 10.757,14.511 10.746,14.507 10.736,14.511 10.732,14.521 10.736,14.531 10.746,14.535
no net on SUP (split plane): 70.898,59.297 70.836,59.291 70.898,59.297 70.907,59.3
no net on SUP (split plane): 68.798,70.097 68.736,70.091 68.798,70.097 68.807,70.1
P3V3 on SUP (split plane): 65.163,17.726 65.205,17.709 65.24,17.681 65.268,17.645 65.285,17.604 65.291,17.559 65.285,17.514 65.268,17.472 65.24,17.436 65.205,17.409 65.163,17.391 65.118,17.385 65.073,17.391 65.031,17.409 64.995,17.436 64.968,17.472 64.95,17.514 64.944,17.559 64.95,17.604 64.968,17.645 64.995,17.681 65.031,17.709 65.073,17.726 65.118,17.732
GND on SUP (split plane): 62.118,79.015 62.159,78.998 62.195,78.97 62.223,78.934 62.24,78.892 62.246,78.847 62.24,78.803 62.223,78.761 62.195,78.725 62.159,78.697 62.118,78.68 62.073,78.674 62.028,78.68 61.986,78.697 61.95,78.725 61.922,78.761 61.905,78.803 61.899,78.847 61.905,78.892 61.922,78.934 61.95,78.97 61.986,78.998 62.028,79.015 62.073,79.021
P3V3 on SUP (split plane): 10.781,14.678 10.823,14.661 10.859,14.633 10.887,14.597 10.904,14.556 10.91,14.511 10.904,14.466 10.887,14.424 10.859,14.388 10.823,14.361 10.781,14.343 10.736,14.337 10.692,14.343 10.65,14.361 10.614,14.388 10.586,14.424 10.569,14.466 10.563,14.511 10.569,14.556 10.586,14.597 10.614,14.633 10.65,14.661 10.692,14.678 10.736,14.684
GND on SUP (split plane): 19.656,81.79 19.645,81.78 19.664,81.734 19.688,81.758 19.69,81.756 19.695,81.75 19.772,81.686 19.861,81.639 19.956,81.61 20.056,81.6 67.29,81.6 67.29,71.636 67.253,71.547 67.281,71.547 67.277,71.509 67.281,71.472 67.286,71.383 67.313,71.222 67.358,71.065 67.421,70.913 67.5,70.77 67.595,70.637 67.704,70.515 67.826,70.405 67.96,70.311 68.103,70.232 68.254,70.169 68.412,70.124 68.573,70.096 68.662,70.091 68.698,70.088 68.736,70.091 68.736,70.063 68.825,70.1 69.39,70.1 69.39,60.836 69.353,60.747 69.381,60.747 69.377,60.709 69.381,60.672 69.386,60.583 69.413,60.422 69.458,60.265 69.521,60.113 69.6,59.97 69.695,59.837 69.804,59.715 69.926,59.605 70.06,59.511 70.203,59.432 70.354,59.369 70.512,59.324 70.673,59.296 70.762,59.291 70.798,59.288 70.836,59.291 70.836,59.263 70.925,59.3 71.99,59.3 71.99,5.993 3.883,5.993 3.883,54.5 5.647,54.5 5.736,54.463 5.736,54.491 5.675,54.497 5.736,54.491 5.775,54.488 5.811,54.491 5.9,54.496 6.061,54.524 6.219,54.569 6.37,54.632 6.513,54.711 6.647,54.805 6.769,54.915 6.878,55.037 6.973,55.17 7.052,55.313 7.114,55.465 7.16,55.622 7.187,55.783 7.192,55.872 7.196,55.909 7.192,55.947 7.22,55.947 7.183,56.036 7.183,81.638 10.578,81.638 10.677,81.648 10.773,81.677 10.861,81.724 10.939,81.788 11.581,82.431 19.015,82.431

## Keep-outs
Keep-Out Layer:
  circle w0.254: c62.073,78.847 r1.18
  lines w0.203: 5.736,54.947 6.329,54.947 6.736,55.354 6.736,55.947 ; 6.736,82.047 10.442,82.047 11.539,83.144 18.93,83.144 20.048,82.026 67.736,82.026 ; 67.736,72.631 68.078,72.289 68.078,70.547 68.224,70.547 ; 69.836,60.747 69.836,59.924 70.013,59.747 70.836,59.747 ; 72.436,14.973 72.855,15.391 72.855,17.485 72.436,17.903 72.436,18.021
  lines w0.254: 3.436,14.846 3.436,5.547 72.436,5.547 72.436,14.973 ; 3.436,54.947 5.736,54.947 ; 6.736,55.947 6.736,69.456 ; 67.736,72.631 67.736,82.047 ; 68.224,70.547 69.836,70.547 69.836,60.747 ; 70.836,59.747 72.436,59.747 72.436,18.021
  lines w0.3: 3.436,14.846 3.027,15.255 3.027,17.66 3.436,18.069 3.436,54.947 ; 6.736,69.456 6.281,69.911 6.281,72.196 6.736,72.652 6.736,82.047

## Other copper
Top Layer:
  region net LVDS_REF: 8.56,59.411 8.56,58.09 9.195,58.09 9.195,59.411
  region net LVDS_REF: 5.512,42.799 5.512,42.316 8.788,42.316 8.788,42.799
  region net LVDS_REF: 8.788,42.634 8.788,41.72 9.83,41.72 9.83,42.634
  region net CON1_P32: 68.95,48.59 68.95,48.031 69.407,48.031 69.407,48.59
  region net CON1_N32: 68.036,48.616 68.036,48.082 68.569,48.082 68.569,48.616
  region net CON1_P30: 65.188,48.602 65.188,48.043 65.645,48.043 65.645,48.602
  region net CON1_N30: 64.274,48.628 64.274,48.094 64.807,48.094 64.807,48.628
  region net CON1_P28: 61.45,48.59 61.45,48.031 61.907,48.031 61.907,48.59
  region net CON1_N28: 60.536,48.616 60.536,48.082 61.069,48.082 61.069,48.616
  region net CON1_P26: 57.7,48.59 57.7,48.031 58.157,48.031 58.157,48.59
  region net CON1_N26: 56.786,48.616 56.786,48.082 57.319,48.082 57.319,48.616
  region net CON1_P24: 53.938,48.602 53.938,48.043 54.395,48.043 54.395,48.602
  region net CON1_N24: 53.024,48.628 53.024,48.094 53.557,48.094 53.557,48.628
  region net CON1_P22: 50.2,48.59 50.2,48.031 50.657,48.031 50.657,48.59
  region net CON1_N22: 49.286,48.616 49.286,48.082 49.819,48.082 49.819,48.616
  region net CON1_P20: 46.45,48.59 46.45,48.031 46.907,48.031 46.907,48.59
  region net CON1_N20: 45.536,48.616 45.536,48.082 46.069,48.082 46.069,48.616
  region net CON1_P18: 42.688,48.602 42.688,48.043 43.145,48.043 43.145,48.602
  region net CON1_N18: 41.774,48.628 41.774,48.094 42.307,48.094 42.307,48.628
  region net CON1_P16: 38.95,48.59 38.95,48.031 39.407,48.031 39.407,48.59
  region net CON1_N16: 38.036,48.616 38.036,48.082 38.569,48.082 38.569,48.616
  region net CON1_P14: 35.2,48.59 35.2,48.031 35.657,48.031 35.657,48.59
  region net CON1_N14: 34.286,48.616 34.286,48.082 34.819,48.082 34.819,48.616
  region net CON1_P12: 31.438,48.602 31.438,48.043 31.895,48.043 31.895,48.602
  region net CON1_N12: 30.524,48.628 30.524,48.094 31.057,48.094 31.057,48.628
  region net CON1_P10: 27.7,48.59 27.7,48.031 28.157,48.031 28.157,48.59
  region net CON1_N10: 26.786,48.616 26.786,48.082 27.319,48.082 27.319,48.616
  region net CON1_P8: 23.938,48.602 23.938,48.043 24.395,48.043 24.395,48.602
  region net CON1_N8: 23.024,48.628 23.024,48.094 23.557,48.094 23.557,48.628
  region net CON1_P6: 20.2,48.59 20.2,48.031 20.657,48.031 20.657,48.59
  region net CON1_N6: 19.286,48.616 19.286,48.082 19.819,48.082 19.819,48.616
  region net CON1_P4: 16.45,48.59 16.45,48.031 16.907,48.031 16.907,48.59
  region net CON1_N4: 15.536,48.616 15.536,48.082 16.069,48.082 16.069,48.616
  region net CON1_N2: 11.786,48.616 11.786,48.082 12.319,48.082 12.319,48.616
  region net CON1_P2: 12.7,48.59 12.7,48.031 13.157,48.031 13.157,48.59
  region net GND: 67.158,53.772 67.158,53.162 67.945,53.162 67.945,53.772
  region net NetF6_2: 17.602,76.429 17.602,75.641 18.517,75.641 18.517,76.429
Bottom Layer:
  rectangle net VADJ: 61.062,18.466 61.417,19.215
  rectangle net GND: 14.143,49.572 14.462,50.156
  region net LVDS_REF: 8.306,59.487 8.306,58.014 9.22,58.014 9.22,59.487
  region net NetF6_2: 17.424,76.581 17.424,75.387 19.101,75.387 19.101,76.581
  region net P3V3: 19.787,72.415 19.787,71.298 24.181,71.298 24.181,72.415
  region net P3V3: 59.316,70.41 59.316,67.545 62.263,67.545 62.263,70.41
SUP (plane layer: these items are gaps in the copper):
  circle w1: c62.073,78.847 r0.674
  circle w2: c20.173,78.847 r0.2
  circle w1: c65.118,17.559 r0.674
  circle w1: c10.736,14.511 r0.674
G (plane layer: these items are gaps in the copper):
  circle w2: c20.173,78.847 r0.2
  circle w1: c65.128,17.569 r0.516
  circle w1: c10.746,14.521 r0.516
  lines w0.152: 12.97,44.933 15.485,44.933 15.713,44.704 15.713,44.399 15.84,44.272 16.425,44.272 16.602,44.45 16.602,44.78 16.755,44.933 18.584,44.933 ; 13.084,62.183 11.328,62.183 ; 14.834,44.933 13.005,44.933 12.852,44.78 12.852,44.45 12.675,44.272 12.09,44.272 11.608,44.755 10.668,44.755 9.474,44.755 8.89,44.171 8.89,43.383 9.22,43.053 10.084,43.053 10.465,42.672 10.465,41.716 10.283,41.533 10.241,41.533 10.211,41.504 8.585,41.504 7.493,42.596 7.493,44.501 7.493,44.704 8.509,45.72 8.941,45.72 68.351,45.72 69.102,44.969 69.102,44.45 ; 16.259,62.183 16.834,62.183 ; 16.72,44.933 19.235,44.933 19.463,44.704 19.463,44.399 19.59,44.272 20.175,44.272 20.352,44.45 20.352,44.78 20.505,44.933 22.334,44.933 ; 18.72,62.183 21.235,62.183 21.463,61.954 21.463,61.649 21.59,61.522 22.175,61.522 22.352,61.7 22.352,62.03 22.505,62.183 24.334,62.183 ; 20.47,44.933 22.985,44.933 23.213,44.704 23.213,44.399 23.34,44.272 23.925,44.272 24.102,44.45 24.102,44.78 24.255,44.933 26.084,44.933 ; 20.584,62.183 18.755,62.183 18.602,62.03 18.602,61.7 18.425,61.522 17.84,61.522 17.713,61.649 17.713,61.954 17.485,62.183 15.785,62.183 15.265,61.663 14.816,61.214 14.399,61.214 13.963,61.649 13.963,61.954 13.735,62.183 11.328,62.183 ; 22.47,62.183 24.985,62.183 25.213,61.954 25.213,61.649 25.34,61.522 25.925,61.522 26.102,61.7 26.102,62.03 26.255,62.183 28.084,62.183 ; 24.22,44.933 26.735,44.933 26.963,44.704 26.963,44.399 27.09,44.272 27.675,44.272 27.852,44.45 27.852,44.78 28.005,44.933 29.834,44.933 ; 26.22,62.183 28.735,62.183 28.963,61.954 28.963,61.649 29.09,61.522 29.675,61.522 29.852,61.7 29.852,62.03 30.005,62.183 31.834,62.183 ; 27.97,44.933 30.485,44.933 30.713,44.704 30.713,44.399 30.84,44.272 31.425,44.272 31.602,44.45 31.602,44.78 31.755,44.933 33.584,44.933 ; 29.97,62.183 32.485,62.183 32.713,61.954 32.713,61.649 32.84,61.522 33.425,61.522 33.602,61.7 33.602,62.03 33.755,62.183 35.584,62.183 ; 31.72,44.933 34.235,44.933 34.463,44.704 34.463,44.399 34.59,44.272 35.175,44.272 35.352,44.45 35.352,44.78 35.505,44.933 37.334,44.933 ; 33.72,62.183 36.235,62.183 36.463,61.954 36.463,61.649 36.59,61.522 37.175,61.522 37.352,61.7 37.352,62.03 37.505,62.183 39.334,62.183 ; 35.47,44.933 37.985,44.933 38.213,44.704 38.213,44.399 38.34,44.272 38.925,44.272 39.102,44.45 39.102,44.78 39.255,44.933 41.084,44.933 ; 37.47,62.183 39.985,62.183 40.213,61.954 40.213,61.649 40.34,61.522 40.925,61.522 41.102,61.7 41.102,62.03 41.255,62.183 43.084,62.183 ; 39.22,44.933 41.735,44.933 41.963,44.704 41.963,44.399 42.09,44.272 42.675,44.272 42.852,44.45 42.852,44.78 43.005,44.933 44.834,44.933 ; 41.22,62.183 43.735,62.183 43.963,61.954 43.963,61.649 44.09,61.522 44.675,61.522 44.852,61.7 44.852,62.03 45.005,62.183 46.834,62.183 ; 42.97,44.933 45.485,44.933 45.713,44.704 45.713,44.399 45.84,44.272 46.425,44.272 46.602,44.45 46.602,44.78 46.755,44.933 48.584,44.933 ; 44.97,62.183 47.485,62.183 47.713,61.954 47.713,61.649 47.84,61.522 48.425,61.522 48.602,61.7 48.602,62.03 48.755,62.183 50.584,62.183 ; 46.72,44.933 49.235,44.933 49.463,44.704 49.463,44.399 49.59,44.272 50.175,44.272 50.352,44.45 50.352,44.78 50.505,44.933 52.334,44.933 ; 48.72,62.183 51.235,62.183 51.463,61.954 51.463,61.649 51.59,61.522 52.175,61.522 52.352,61.7 52.352,62.03 52.505,62.183 54.334,62.183 ; 50.47,44.933 52.985,44.933 53.213,44.704 53.213,44.399 53.34,44.272 53.925,44.272 54.102,44.45 54.102,44.78 54.255,44.933 56.084,44.933 ; 52.47,62.183 54.985,62.183 55.213,61.954 55.213,61.649 55.34,61.522 55.925,61.522 56.102,61.7 56.102,62.03 56.255,62.183 58.084,62.183 ; 54.22,44.933 56.735,44.933 56.963,44.704 56.963,44.399 57.09,44.272 57.675,44.272 57.852,44.45 57.852,44.78 58.005,44.933 59.834,44.933 ; 56.22,62.183 58.735,62.183 58.963,61.954 58.963,61.649 59.09,61.522 59.675,61.522 59.852,61.7 59.852,62.03 60.005,62.183 61.834,62.183 ; 57.97,44.933 60.485,44.933 60.713,44.704 60.713,44.399 60.84,44.272 61.425,44.272 61.602,44.45 61.602,44.78 61.755,44.933 63.584,44.933 ; 59.97,62.183 62.485,62.183 62.713,61.954 62.713,61.649 62.84,61.522 63.425,61.522 63.602,61.7 63.602,62.03 63.755,62.183 65.584,62.183 ; 61.72,44.933 64.235,44.933 64.463,44.704 64.463,44.399 64.59,44.272 65.175,44.272 65.352,44.45 65.352,44.78 65.505,44.933 67.334,44.933 ; 63.72,62.183 66.235,62.183 66.463,61.954 66.463,61.649 66.59,61.522 67.175,61.522 67.352,61.7 67.352,62.03 67.352,62.213 66.599,62.967 20.803,62.967 20.345,63.424 20.345,63.906 20.193,64.059 19.533,64.059 19.253,63.779 19.253,63.195 19.025,62.967 9.931,62.967 8.306,61.341 8.306,58.725 8.814,58.217 9.423,58.217 9.55,58.344 9.55,60.732 10.312,61.493 11.255,61.493 11.255,62.109 11.328,62.183 ; 65.47,44.933 67.985,44.933 68.213,44.704 68.213,44.399 68.34,44.272 68.925,44.272 69.102,44.45 ; 69.102,44.78 69.102,44.45
  lines w1: 62.967,78.848 cw(c62.08,78.849) 62.967,78.867

## Silkscreen, mask and mechanical layers (free items; w line width, h text height)
Top Overlay:
  lines w0.127: 6.736,82.111 6.736,82.149
  text "FMC DIO 32ch lvds a" at 26.695,68.732 h1.52
  text "v1.2" at 39.446,66.599 h1.52
Bottom Overlay:
  text "http://www.ohwr.org/projects/fmc-dio-32chlvdsa" at 71.552,22.225 h1.52
  text "http://ohwr.org/cernohl" at 34.29,19.101 h1
  text "Licensed under CERN OHL" at 57.76,19.101 h1
  text "FMC DIO 32ch lvds a" at 40.132,11.786 h1.52
  text "v1.2" at 25.552,9.195 h1.52
Top Solder:
  region: 18.168,83.195 18.168,87.64 28.709,87.64 28.709,83.195
Mechanical 1:
  lines w0.1: 5.736,54.947 ccw(c5.736,55.947) 6.736,55.947 ; 67.736,71.547 ccw(c68.736,71.547) 68.736,70.547 ; 69.836,60.747 ccw(c70.836,60.747) 70.836,59.747
  lines w0.127: 3.436,5.547 39.536,5.547 72.436,5.547 72.436,29.447 72.436,32.647 72.436,59.747 70.836,59.747 ; 3.462,5.547 3.436,5.572 3.436,54.947 5.736,54.947 ; 6.736,55.947 6.736,64.047 6.736,82.047 ; 19.977,82.047 67.736,82.047 67.736,71.547 ; 68.736,70.547 69.836,70.547 69.836,67.247 69.836,64.047 69.836,60.747
  lines w0.203: 6.736,82.047 10.62,82.047 11.412,82.839 19.184,82.839 19.977,82.047
Mechanical 10:
  lines w0.1: 0.936,54.947 3.436,54.947 ; -1.564,5.547 3.436,5.547 -1.564,5.547

## Text inside footprints (layer, text, board x,y; h text height)
J40: Top Overlay "d" at 8.534,13.132 h1 r270; Top Overlay "c" at 8.788,11.735 h1 r270; Top Overlay "h" at 8.661,21.006 h1 r270; Top Overlay "g" at 8.661,19.736 h1 r270; Top Overlay "40" at 66.294,21.996 h1 r270; Top Overlay "1" at 12.51,22.583 h1 r270; Mechanical 14 "c" at 7.955,11.59 h1 r270; Mechanical 14 "d" at 7.938,12.966 h1 r270; Mechanical 14 "h" at 7.955,18.067 h1 r270; Mechanical 14 "g" at 8.065,16.741 h1 r270; Mechanical 14 "40" at 65.232,21.623 h1 r180; Mechanical 14 "1" at 12.51,22.583 h1 r270
J42: Top Overlay "36" at 27.828,78.479 h1.2; Top Overlay "1" at 27.964,71.644 h1.2; Top Overlay "68" at 53.429,78.479 h1.2; Top Overlay "33" at 52.743,71.646 h1.2; Mechanical 14 "1" at 27.964,71.644 h1.2; Mechanical 14 "33" at 52.743,71.646 h1.2; Mechanical 8 "EDGE OF PCB" at 37.105,82.939 h1